# Altium PCB Q-Dice.PcbDoc
Units mm, origin at the board's own origin, x right, y up, seen from the top; angles counter-clockwise.
Board outline 75 x 107 mm, 2 copper layers (Top Layer, Bottom Layer); 64 components, 54 nets, 254 pads, 4 vias.
Unrouted connection lines stored in the file: 127.
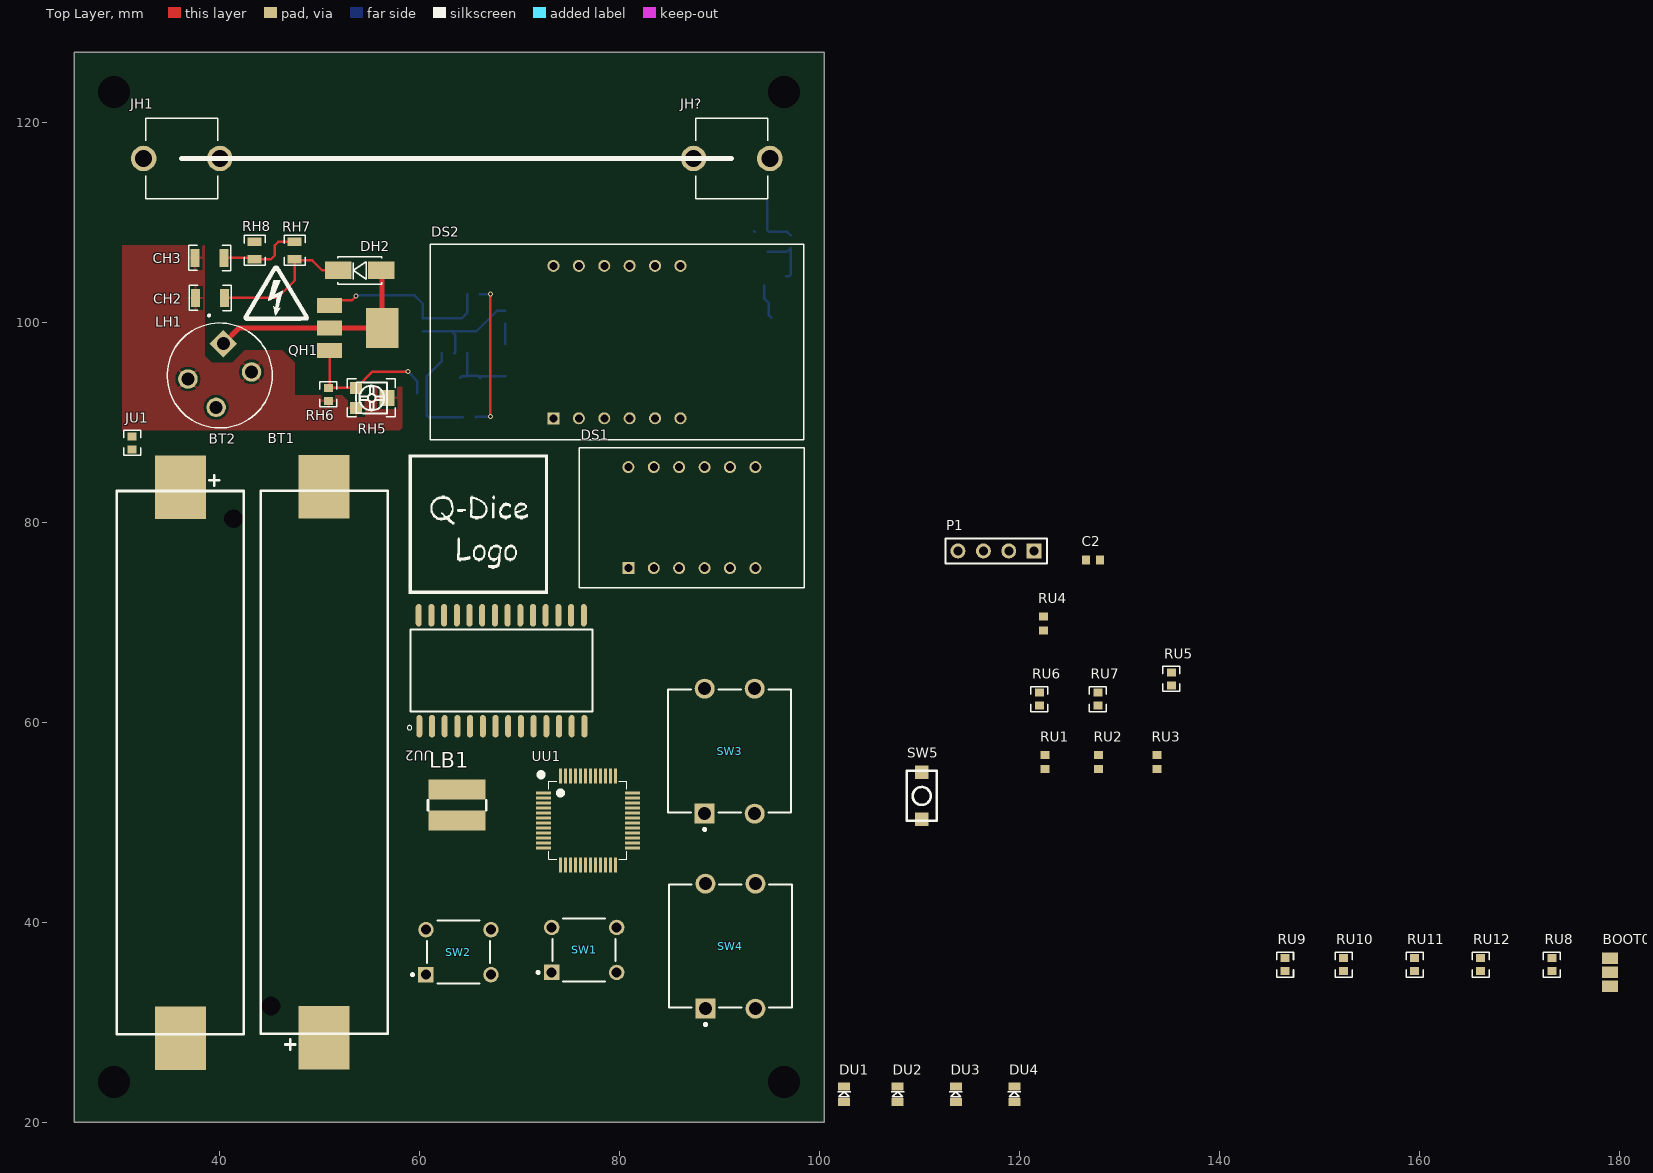
[diagram p0: Top Layer view]
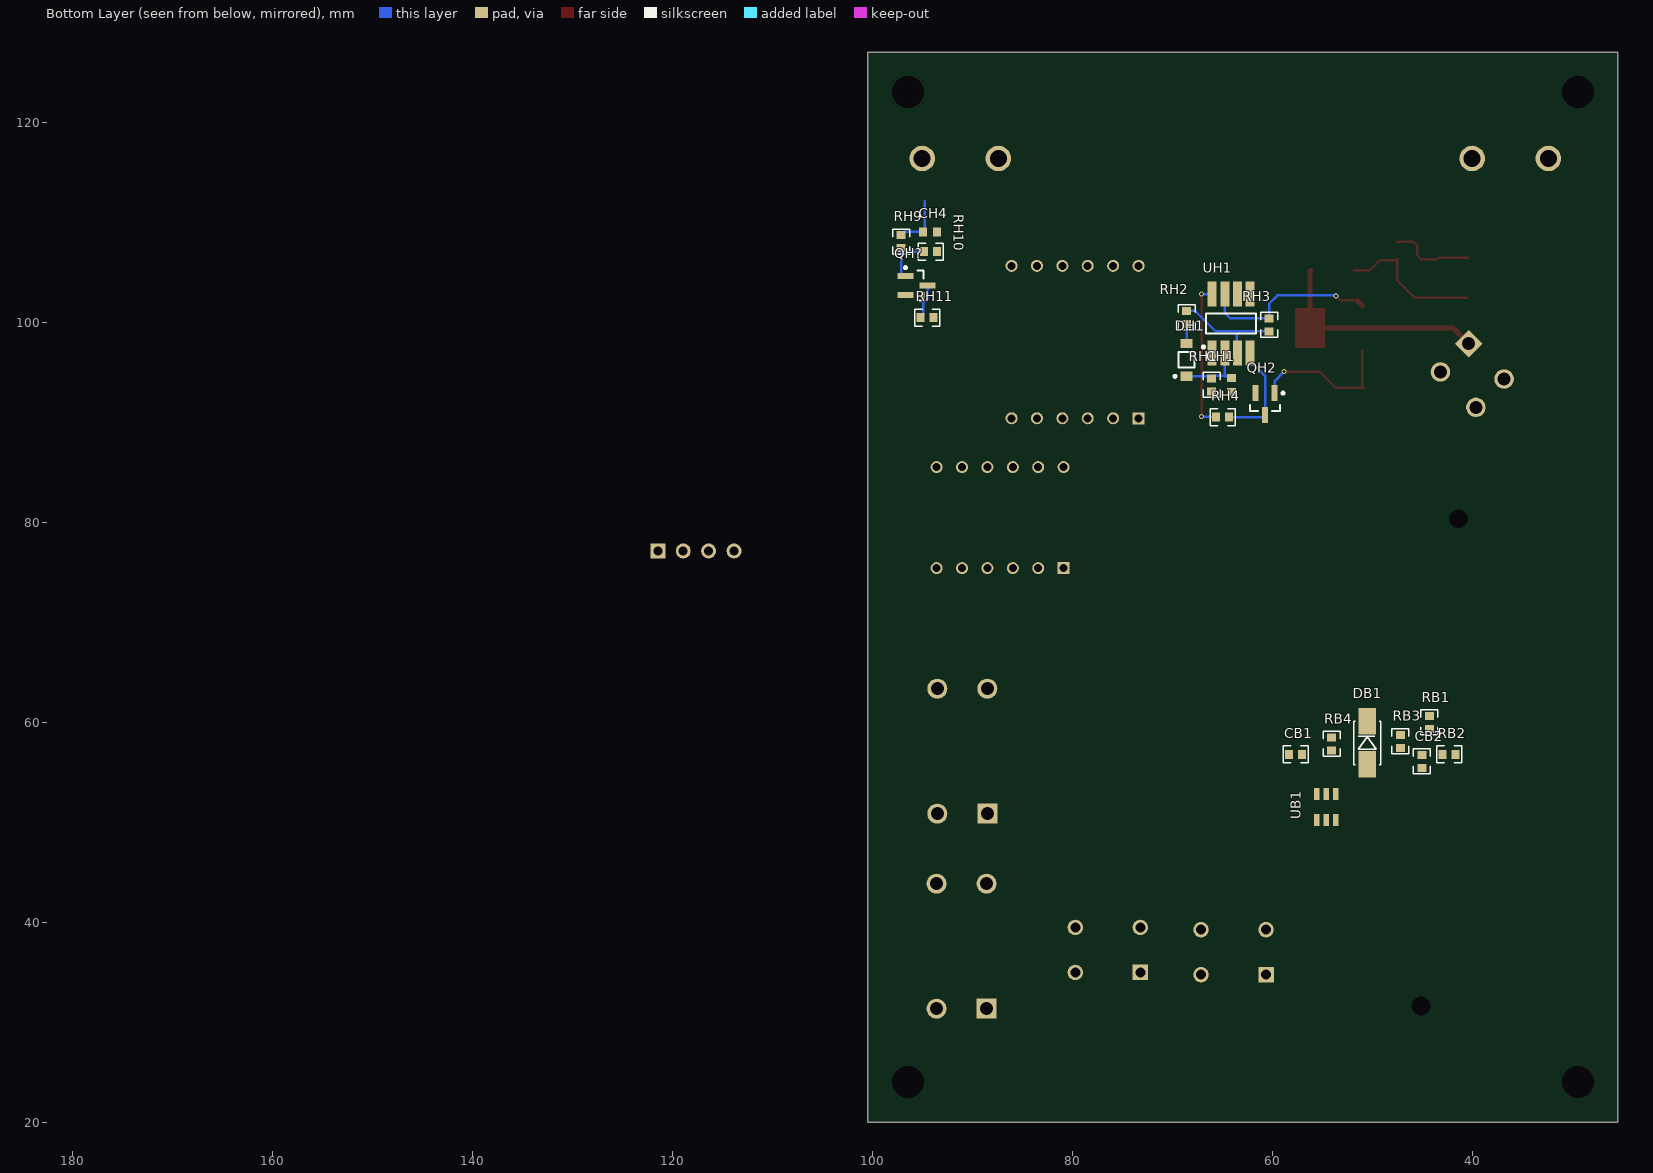
[diagram p1: Bottom Layer view, seen from below]

## Layer stack, top to bottom
Top Solder: solder mask 0.0102, Solder Resist, Dk 3.5
Top Layer: signal copper 0.0356
Dielectric 1: dielectric 0.32, FR-4, Dk 4.8
Bottom Layer: signal copper 0.0356
Bottom Solder: solder mask 0.0102, Solder Resist, Dk 3.5

## Board outline
25.45,20 25.45,127 100.45,127 100.45,20

## Design rules (kind name [scope] priority, off if disabled: settings)
Clearance [All] p1: gap=0.254 ignorepadtopadclearanceinfootprint=FALSE except(0: Arc-Hole Track-Hole SMDPad-Hole THPad-Hole Via-Hole Fill-Hole Poly-Hole Region-Hole Text-Hole)
PolygonConnect [All] p1: connectstyle=Relief reliefconductorwidth=0.254 reliefentries=4 polygonreliefangle="90 Angle" airgapwidth=0.254
RoutingVias [All] p1: holewidth=0.711 width=1.27 viastyle="Through Hole" minholewidth=0.3 minwidth=0.5 maxholewidth=0.711 maxwidth=1.27
SolderMaskExpansion [All] p1: expansion=0.102 istentingtop=FALSE
Width [All] p1: maxlimit=1 minlimit=0.152 preferedwidth=0.254
30 further rules are at their usual default settings.

## Classes and differential pairs
component class U_BoostConverter: CB1 CB2 DB1 LB1 RB1 RB2 RB3 RB4 UB1
component class U_GM-hv: CH1 CH2 CH3 CH4 DH1 DH2 JH1 JH? LH1 QH1 QH2 QH? RH1 RH2 RH3 RH4 RH5 RH6 RH7 RH8 RH9 RH10 RH11 UH1
component class Sheet1: BOOT0 BT1 BT2 C2 DS1 DS2 DU1 DU2 DU3 DU4 JU1 P1 RU1 RU2 RU3 RU4 RU5 RU6 RU7 RU8 RU9 RU10 RU11 RU12 SW1 SW2 SW3 SW4 SW5 UU1 UU2

## Components (designator, comment, footprint, x,y, rotation, side; value= is the part's Value field where it differs from the comment)
BOOT0 "2-Way Solder Jumper" SOLDERJUMPER_2WAY_OPEN_NOPASTE 179.009,35.002 r90 top
BT1 "Holder Cr2032 Gold Leads Smd" "AAA HOLDER SMD" 50.435,28.53 r90 top
BT2 "Holder Cr2032 Gold Leads Smd" "AAA HOLDER SMD" 36.065,83.42 r270 top
C2 "100nF" "C 0603 / 1608" 127.339,76.213 r0 top
CB1 "Cap" CAP0603R 57.675,56.775 r180 bottom value=28u
CB2 "Cap" CAP0603R 45.05,56.075 r90 bottom value=28u
CH1 "Cap" "C 0603 / 1608" 64.055,93.73 r90 bottom value=1nF
CH2 "Cap" CAP1206R 39.05,102.425 r0 top value=10nF/1kV
CH3 "Cap" CAP1206R 39,106.425 r0 top value=10nF/1kV
CH4 "Cap" "C 0603 / 1608" 94.225,109.025 r0 bottom value=220p
DB1 "SS34" DO-214AC 50.5,57.925 r90 bottom
DH1 "MMSD4148T1G" ONSC-SOD-123-2-425-04_V 68.57,96.23 r90 bottom
DH2 "BYG23M" DO-214AC 54,105.175 r180 top
DS1 "0.36''" "7-SEG 3BIT 0.36" 87.217,80.46 r0 top
DS2 "0.56''" BA56-12EWA 79.724,98.016 r0 top
DU1 "LED" "LED 0603" 102.43,22.801 r90 top
DU2 "LED" "LED 0603" 107.78,22.801 r90 top
DU3 "LED" "LED 0603" 113.606,22.801 r90 top
DU4 "LED" "LED 0603" 119.456,22.801 r90 top
JH1 "Fuse Clip" FUSE_BK-6003 36.2,116.375 r0 top
JH? "Fuse Clip" FUSE_BK-6003 91.2,116.375 r180 top
JU1 "JMP" RES0603R 31.25,87.925 r90 top value=0
LB1 "Inductor" "INDUCTOR CD54" 63.75,51.7 r0 top value=22uH
LH1 "12LRS156C" IND_12LRS156C 40,94.675 r315 top value=10mH
P1 "Header 4" HDR1X4 121.445,77.125 r180 top
QH1 "STN0214" "SOT-223-3 - NPN" 50.25,102.675 r270 top
QH2 "MMBT4401" ONSC-SOT-23-3-318-08_M 60.725,91.8 r270 bottom
QH? "MMBT4401" ONSC-SOT-23-3-318-08_M 95.575,103.65 r180 bottom
RB1 "Res1" RES0603R 44.3,59.975 r270 bottom value=JMP
RB2 "Res1" RES0603R 42.325,56.775 r0 bottom value=JMP
RB3 "Res1" RES0603R 47.2,58.075 r270 bottom value=11.5k
RB4 "Res1" RES0603R 54.075,57.825 r270 bottom value=2.55k
RH1 "Res1" RES0603R 66.055,93.73 r90 bottom value=220k
RH2 "Res1" RES0603R 68.555,100.48 r90 bottom value=1k
RH3 "Res1" RES0603R 60.305,99.73 r90 bottom value=330
RH4 "Res1" RES0603R 64.975,90.5 r0 bottom value=100k
RH5 "RPot" SMD_POT_3x3mm 52.95,94.025 r270 top value=200
RH6 "Res1" RES0603R 50.873,92.775 r90 top value=10k
RH7 "Res1" RES0805R 47.5,107.175 r90 top value=1M
RH8 "Res1" RES0805R 43.5,107.175 r90 top value=4.7M
RH9 "Res1" RES0603R 97.125,108.05 r90 bottom value=1.5k
RH10 "Res1" RES0603R 94.175,107.05 r0 bottom value=100k
RH11 "Res1" RES0603R 94.525,100.45 r180 bottom value=10k
RU1 "Res1" "C 0603 / 1608" 122.532,56.04 r90 top value=10k
RU2 "Res1" "C 0603 / 1608" 127.866,56.04 r90 top value=10k
RU3 "Res1" "C 0603 / 1608" 133.708,56.04 r90 top value=10k
RU4 "Res1" "C 0603 / 1608" 122.356,69.858 r90 top value=20k
RU5 "Res1" RES0603R 135.175,64.325 r90 top value=10k
RU6 "Res1" RES0603R 121.975,62.303 r90 top value=10k
RU7 "Res1" RES0603R 127.817,62.303 r90 top value=10k
RU8 "Res1" RES0603R 173.208,35.752 r90 top value=10k
RU9 "Res1" RES0603R 146.532,35.752 r90 top value=1k
RU10 "Res1" RES0603R 152.382,35.752 r90 top value=1k
RU11 "Res1" RES0603R 159.483,35.752 r90 top value=1k
RU12 "Res1" RES0603R 166.083,35.752 r90 top value=1k
SW1 "EVQ-PAE05R" FP-EVQ-PAE05R-MFG 76.45,37.225 r90 top
SW2 "EVQ-PAE05R" FP-EVQ-PAE05R-MFG 63.875,37 r90 top
SW3 "FSM100" FP-FSM100-MFG 91,57.1 r90 top
SW4 "FSM100" FP-FSM100-MFG 91.075,37.6 r90 top
SW5 "Switch" PUSH_SMD_3x4 111.7,50.125 r90 top
UB1 "MT3608" SOT23-6 54.6,51.5 r180 bottom
UH1 "NE555P" SOIC-8 64.115,99.868 r90 bottom
UU1 "STM32L053C8T6" LQFP48_7X7MM_0.5MMPP 76.825,50.175 r0 top
UU2 "TM1638" SOP-28 68.185,65.15 r90 top

## Footprints (in the part's own frame and the unit in brackets; to place one, negate y for a bottom-side part, rotate by r counter-clockwise, add the part's x,y. Pads: shape width x height; smd on the part's side, far side on the other; paste and mask are expansions set on the pad)
"7-SEG 3BIT 0.36" [mm]
  rect 1.2x1.2 hole 0.8: 1(-6.35,-5.05)
  round 1.2 hole 0.8: 2(-3.81,-5.05) 3(-1.27,-5.05) 4(1.27,-5.05) 5(3.81,-5.05) 6(6.35,-5.05) 7(6.35,5.05) 8(3.81,5.05) 9(1.27,5.05) 10(-1.27,5.05) 11(-3.81,5.05) 12(-6.35,5.05)
  silkscreen extent -11.25,-7 11.25,7, body extent -11.29,-6.95 11.21,7.05, height 7.3
"AAA HOLDER SMD" [mm]
  rect 6.35x5.08 smd: 1(-0.1,0) 2(55.03,0)
  rect 0x0 hole 1.89: ""(3.07,5.31)
  silkscreen extent -1.28,-6.35 54.63,6.35, body extent -3.9,-6.21 58.7,6.29, height 11.25
BA56-12EWA [mil]
  rect 47.25x47.25 hole 31.5: 1(-250,-300)
  round 47.25 hole 31.5: 2(-150,-300) 3(-50,-300) 4(50,-300) 5(150,-300) 6(250,-300) 7(250,300) 8(150,300) 9(50,300) 10(-50,300) 11(-150,300) 12(-250,300)
  silkscreen extent -735,-385 735,385, body extent -739,-373 742,375, height 317
"C 0603 / 1608" [mm] "Capacitor 0603 / 1608 (1.6 x 0.8 mm)"
  rect 0.8x0.9 smd: 1(-0.7,0) 2(0.7,0)
  body extent -0.8,-0.4 0.8,0.4, height 0.3
CAP0603R [mm] "capacitor 0603 reflow soldering"
  rect 0.8x0.9 smd: 1(-0.65,0) 2(0.65,0)
  silkscreen extent -1.25,-0.85 1.25,0.85, body extent -0.8,-0.4 0.8,0.4, height 0.3
CAP1206R [mm] "capacitor 1206 reflow soldering"
  rect 0.9x1.8 smd: 1(-1.45,0) 2(1.45,0)
  silkscreen extent -2.1,-1.27 2.1,1.27, body extent -1.6,-0.8 1.6,0.8, height 1
DO-214AC [mm]
  rect 2.65x1.75 smd: 1(-2.15,0) 2(2.15,0)
  silkscreen extent -2.19,-1.36 2.19,1.36, body extent -2.6,-1.3 2.6,1.3, height 2.4
FP-EVQ-PAE05R-MFG [mm]
  rect 1.55x1.55 hole 1 paste-1000 mask+0: A(-2.25,3.25)
  round 1.55 hole 1 paste-1000 mask+0: A'(-2.25,-3.25) B(2.25,3.25) B'(2.25,-3.25)
  silkscreen extent -3.15,-3.15 3.15,4.72, body extent -3.25,-4.13 3.25,4.13, height 0.25
FP-FSM100-MFG [mm]
  rect 2x2 hole 1.3 paste-1000 mask+0: 1(-6.25,2.5)
  round 2 hole 1.3 paste-1000 mask+0: 2(6.25,2.5) 3(-6.25,-2.5) 4(6.25,-2.5)
  silkscreen extent -7.95,-6.15 6.15,6.15, body extent -7.35,-6.25 7.35,6.25, height 0.25
FUSE_BK-6003 [mm]
  round 2.55 hole 1.7: 1(-3.81,0) 1(3.81,0)
  silkscreen extent -3.58,-4.01 3.58,4.01, body extent -3.56,-3.39 3.55,3.5, height 10.67
HDR1X4 [mm] "Connector; Header; 4 Position"
  rect 1.5x1.5 hole 0.9: 1(0,0)
  round 1.5 hole 0.9: 2(2.54,0) 3(5.08,0) 4(7.62,0)
  silkscreen extent -1.27,-1.27 8.89,1.27
IND_12LRS156C [mm]
  rect 1.95x1.95 hole 1.3: 1(-2,2.5)
  round 1.95 hole 1.3: 2(-2,-2.5) 3(2,-2.5) 4(2,2.5)
  silkscreen extent -5.25,-5.25 5.25,5.25, body extent -5.25,-5.25 5.25,5.25, height 10.5
"INDUCTOR CD54" [mm]
  rect 5.7x2 smd: 1(0,1.55) 2(0,-1.55)
  silkscreen extent -2.92,-0.51 2.92,0.48, body extent -2.6,-2.96 2.6,2.96, height 4.5
"LED 0603" [mm]
  rect 0.8x1.2 smd: 1(-0.762,0) 2(0.762,0)
  silkscreen extent -0.25,-0.65 0.25,0.64, body extent -0.81,-0.45 0.89,0.45, height 0.75
LQFP48_7X7MM_0.5MMPP [mm]
  rect 1.5x0.3 smd: 1(-4.45,2.75) 2(-4.45,2.25) 3(-4.45,1.75) 4(-4.45,1.25) 5(-4.45,0.75) 6(-4.45,0.25) 7(-4.45,-0.25) 8(-4.45,-0.75) 9(-4.45,-1.25) 10(-4.45,-1.75) 11(-4.45,-2.25) 12(-4.45,-2.75) 25(4.45,-2.75) 26(4.45,-2.25) 27(4.45,-1.75) 28(4.45,-1.25) 29(4.45,-0.75) 30(4.45,-0.25) 31(4.45,0.25) 32(4.45,0.75) 33(4.45,1.25) 34(4.45,1.75) 35(4.45,2.25) 36(4.45,2.75)
  rect 0.3x1.5 smd: 13(-2.75,-4.45) 14(-2.25,-4.45) 15(-1.75,-4.45) 16(-1.25,-4.45) 17(-0.75,-4.45) 18(-0.25,-4.45) 19(0.25,-4.45) 20(0.75,-4.45) 21(1.25,-4.45) 22(1.75,-4.45) 23(2.25,-4.45) 24(2.75,-4.45) 37(2.75,4.45) 38(2.25,4.45) 39(1.75,4.45) 40(1.25,4.45) 41(0.75,4.45) 42(0.25,4.45) 43(-0.25,4.45) 44(-0.75,4.45) 45(-1.25,4.45) 46(-1.75,4.45) 47(-2.25,4.45) 48(-2.75,4.45)
  silkscreen extent -4.9,-3.9 3.9,4.78, body extent -4.5,-4.5 4.5,4.5, height 1.6
ONSC-SOD-123-2-425-04_V [mm] "SOD, 2-Leads, Body 2.69x1.6mm"
  rect 0.91x1.22 smd: 1(-1.635,0) 2(1.635,0)
  silkscreen extent -1.76,-0.8 0.78,1.29, body extent -1.35,-0.8 1.35,0.8, height 1.35
ONSC-SOT-23-3-318-08_M [mm] "SOT23, 3-Leads, Body 3.04x1.4mm, Pitch 0.95mm, IPC Low Density"
  rect 1.6x0.6 smd: 1(-1.1,0.95) 2(-1.1,-0.95) 3(1.1,0)
  silkscreen extent -1.22,-1.5 0.7,1.92, body extent -0.7,-1.52 0.7,1.52, height 1.11
PUSH_SMD_3x4 [mm]
  rect 1.35x1.35 smd: 1(0.15,1.5) 2(4.85,1.5)
  silkscreen extent 0,0 5,3, body extent 0.05,0.05 4.95,2.95, height 2
RES0603R [mm] "resistor 0603 reflow soldering"
  rect 0.8x0.9 smd: 1(-0.65,0) 2(0.65,0)
  silkscreen extent -1.25,-0.85 1.25,0.85, body extent -0.8,-0.4 0.8,0.4, height 0.45
RES0805R [mm] "resistor 0805 reflow soldering"
  rect 0.85x1.4 smd: 1(-0.875,0) 2(0.875,0)
  silkscreen extent -1.5,-1.05 1.5,1.05, body extent -1,-0.62 1,0.63, height 0.5
SMD_POT_3x3mm [mm] "https://ae01.alicdn.com/kf/HTB1u8VOIVXXXXaMXFXXq6xXFXXXn/202183707/HTB1u8VOIVXXXXaMXFXXq6xXFXXXn.jpg?size=54797&height=535&width=908&hash=f9182dae1c0bb9b5ef09d7fbeb165d97"
  rect 1.2x1.2 smd: 1(0.6,0.7) 3(2.6,0.7)
  rect 1.6x1.5 smd: 2(1.6,3.8)
  silkscreen extent -0.3,-0.2 3.5,4.6, body extent 0.05,0.3 3.15,4.1, height 1.62
SOIC-8 [mm]
  rect 2.5x0.9 smd: 1(-2.95,1.905) 2(-2.95,0.635) 3(-2.95,-0.635) 4(-2.95,-1.905) 5(2.95,-1.905) 6(2.95,-0.635) 7(2.95,0.635) 8(2.95,1.905)
  silkscreen extent -2.47,-2.5 1,2.88, body extent -3,-2.45 3,2.45, height 1.75
SOLDERJUMPER_2WAY_OPEN_NOPASTE [mil]
  rect 46x63 smd paste-31.5: 1(-55,0) 3(55,0)
  rect 46x63 smd: 2(0,0)
SOP-28 [mm]
  oval 2.25x0.6 smd: 1(-5.55,8.225) 2(-5.55,6.955) 3(-5.55,5.685) 4(-5.55,4.415) 5(-5.55,3.145) 6(-5.55,1.875) 7(-5.55,0.605) 8(-5.55,-0.665) 9(-5.55,-1.935) 10(-5.55,-3.205) 11(-5.55,-4.475) 12(-5.55,-5.745) 13(-5.55,-7.015) 14(-5.55,-8.285) 15(5.55,-8.225) 16(5.55,-6.955) 17(5.55,-5.685) 18(5.55,-4.415) 19(5.55,-3.145) 20(5.55,-1.875) 21(5.55,-0.605) 22(5.55,0.665) 23(5.55,1.935) 24(5.55,3.205) 25(5.55,4.475) 26(5.55,5.745) 27(5.55,7.015) 28(5.55,8.285)
  silkscreen extent -5.92,-9.1 4.1,9.42, body extent -5.1,-8.87 5.1,8.87, height 2.8
SOT23-6 [mm]
  rect 0.55x1.2 smd: 1(-0.95,-1.3) 2(0,-1.3) 3(0.95,-1.3) 4(0.95,1.3) 5(0,1.3) 6(-0.95,1.3)
"SOT-223-3 - NPN" [mm]
  rect 4x3.25 smd: 1(3.25,6)
  rect 1.5x2.5 smd: 1(3.25,0.75) 2(1,0.75) 3(5.5,0.75)
  Top Layer region: 1.25,4.5 5.25,4.5 5.25,7.5 1.25,7.5
  body extent -0.1,-0.22 6.6,7.08, height 1.8

## Part data
BOOT0: library part SOLDERJUMPER_2WAY0603
BT1 BT2: library part BU2032SM-BT-GTR, Package=None, Availability=Good, MF=MPD, MP=BU2032SM-BT-GTR, Price="0.64 USD"
C2: library part Capacitor
CB1 CB2 CH1 CH2 CH3 CH4: "Capacitor", LatestRevisionDate=17-Jul-2002, LatestRevisionNote="Re-released for DXP Platform.", PackageDescription="Radial Cap, Thru-Hole; 2 Leads; 0.3 in Pin Spacing", PackageReference=RAD-0.3, Published=8-Jun-2000, Publisher="Altium Limited"
DB1 DH2: library part Diode, "Default Diode", Code_JEDEC=DO-214-AB, LatestRevisionDate=17-Jul-2002, LatestRevisionNote="Re-released for DXP Platform.", PackageDescription="DO-214-AB/SMC; 2 C-Bend Leads; Body 7.9 x 5.9 mm, inc. leads (LxW)", PackageReference=SMC, PackageVersion=Sep-1996, Published=8-Jun-2000, Publisher="Altium Limited"
DH1: library part CMP-0895-00001-2, "Switching Diode, 2-Pin SOD-123, Pb-Free, Tape and Reel", Manufacturer="On Semiconductor", ComponentLink1Description="Manufacturer URL", ComponentLink1URL=http://www.onsemi.com/, ComponentLink2Description=Datasheet, ComponentLink2URL=http://www.onsemi.com/pub_link/Collateral/MMSD4148T1-D.PDF, ComponentLink3Description="Package Specification", ComponentLink3URL=http://www.onsemi.com/pub_link/Collateral/425-04.PDF, Configuration=Single, DatasheetVersion="Rev. 11", IF Max (A)=0.2, Mounting Technology="Surface Mount", PackageDescription="2-Pin SOD, Body 1.6 x 2.69 mm", PackageReference=SOD-123-2-425-04, PackageVersion="Rev. G, 10/2009", Packing="Tape and Reel", PartNumber=MMSD4148T1G, RoHS=TRUE, trr Max (ns)=4
DS1 DS2: library part BA56-12EWA, Package="DIP-12 Kingbright", Availability=Good, MF=Kingbright, MP=BA56-12EWA, Price="2.42 USD"
JU1: library part Res1, "Resistor", LatestRevisionDate=17-Jul-2002, LatestRevisionNote="Re-released for DXP Platform.", PackageDescription="Axial Device, Thru-Hole; 2 Leads; 0.3 in Pin Spacing", PackageReference=AXIAL-0.3, Published=8-Jun-2000, Publisher="Altium Limited"
LH1: library part Inductor_Shielded, "Inductor", Code_IEC=1005, Code_JEITA=0402, LatestRevisionDate=29-May-2009, LatestRevisionNote="IPC-7351 Footprint Added.", PackageDescription="Chip Inductor", PackageReference=0402-A, Published=8-Jun-2000, Publisher="Altium Limited"
P1: "Header, 4-Pin", LatestRevisionDate=17-Jul-2002, LatestRevisionNote="Re-released for DXP Platform.", Publisher="Altium Limited"
QH1: library part NPN, "NPN Bipolar Transistor", Code_JEDEC=TO-226-AA, LatestRevisionDate=17-Jul-2002, LatestRevisionNote="Re-released for DXP Platform.", PackageDescription="TO, Flat Index; 3 In-Line, Axial Leads; Body Dia. 4.8mm; Leads 0.55 x 0.51 mm (max)", PackageReference=TO-226-AA, Published=8-Jun-2000, Publisher="Altium Limited"
QH2 QH?: library part CMP-0722-00001-1, "General Purpose Transistor, NPN, 0.6 A IC Continuous, 3-Pin SOT23, RoHS, Tape and Reel", Manufacturer="ON Semiconductor", PartNumber=MMBT2222LT1G, ComponentLink1Description="Manufacturer URL", ComponentLink1URL=http://www.onsemi.com/, ComponentLink2Description=Datasheet, ComponentLink2URL=http://www.onsemi.com/pub_link/Collateral/MMBT2222LT1-D.PDF, ComponentLink3Description="Package Specification", ComponentLink3URL=http://www.onsemi.com/pub_link/Collateral/MMBT2222LT1-D.PDF, DatasheetVersion="Rev. 10", FT="250 MHz", HFE Max.=300, HFE Min.=100, IC Continuous="0.6 A", Mounting Technology="Surface Mount", PackageDescription="3-Pin SOT23, Body 2.9 x 1.3 mm, Pitch 0.95 mm", PackageReference=SOT-23-3, PackageVersion="Rev. AP", Packing="Tape and Reel", Polarity=NPN, PTM Max.="0.225 W", RoHS=TRUE, V(BR) CEO="30 V Min."
RB1 RB2 RB3 RB4 RH1 RH2 RH3 RH4 RH6 RH7 RH8 RH9 RH10 RH11 RU1 RU2 RU3 RU4 RU5 RU6 RU7 RU8 RU9 RU10 RU11 RU12: "Resistor", LatestRevisionDate=17-Jul-2002, LatestRevisionNote="Re-released for DXP Platform.", PackageDescription="Axial Device, Thru-Hole; 2 Leads; 0.3 in Pin Spacing", PackageReference=AXIAL-0.3, Published=8-Jun-2000, Publisher="Altium Limited"
RH5: "Potentiometer", LatestRevisionDate=17-Jul-2002, LatestRevisionNote="Re-released for DXP Platform.", PackageDescription="Variable Resistor, Thru-Hole; 3 Leads", PackageReference=VR5, Published=8-Jun-2000, Publisher="Altium Limited", Set Position=0.5, Sim Note="Enter the Resistance value and the set point into parameter fields."
SW1 SW2: library part CMP-05618-000051-1, "SWITCH TACTILE SPST-NO 0.02A 15V", Actuator Color=Red, Contact Current Rating=20mA, Contact Resistance=50mR, Max Operating Temperature=70°C, Max Voltage Rating (DC)=15V, Min Operating Temperature=-20°C, Operating Force=1.6N, Package Quantity=500, Actuator Length=1.1mm, Actuator Type=Standard, Color=Red, Contact Plating=Gold, Current Rating=20mA, Depth=7.8mm, Electrical Life=100000Cycles, Height=5mm, Illumination Type=Non-Illuminated, Lead Free="Lead Free", Length=6mm, Max Current Rating=20mA, Mechanical Life=100000Cycles, Mount="Through Hole", Orientation=Straight, Packaging=Bulk, Radiation Hardening=No, Series=EVQPA, Size=6mm, Switch Function=Off-Mom, Switch Travel=0.25mm, Termination="PC Pin", Throw Configuration=SPST, Voltage Rating (DC)=15V, Width=6mm
SW3 SW4: library part CMP-03402-000014-1, "SWITCH TACTILE SPST-NO 0.05A 24V", Actuator Color=Black, Contact Current Rating=50mA, Contact Resistance=100mR, Max Operating Temperature=85°C, Max Voltage Rating (DC)=12V, Min Operating Temperature=-35°C, Operating Force=1.57N, Package Quantity=400, Voltage Rating (DC)=24V, Actuator Length=6.35mm, Actuator Material=Polyester, Actuator Type=Standard, Contact Material="Copper Alloy", Contact Plating=Silver, Contact Type="1 maker", Current Rating=50mA, Depth=12.5mm, Electrical Life=100000Cycles, ELV=Compliant, Illumination Type=Non-Illuminated, Lead Free="Lead Free", Length=12mm, Max Current Rating=50mA, Mechanical Life=100000Cycles, Mount="Through Hole", Orientation=Straight, Packaging="Loose Piece", RoHS Compliant=Yes, Series="FSM100 ~ 104", Switch Function=Off-Mom, Switch Travel=0.3mm, Termination="PC Pins", Throw Configuration=SPST, Type=Switch
SW5: library part B3U-1000P, Manufacturer=Omron, DIGIKEY=SW1020CT-ND, MPN=B3U-1000P
UB1: "Boost converter"
UH1: Package="PDIP-8 STMicroelectronics", Availability=Unavailable, MF="Texas Instruments", MP=NE555P, Price=None, SnapEDA_Link=https://www.snapeda.com/parts/NE555P/Texas%20Instruments/view-part/?ref=snap
UU1: "ARMÂ® CortexÂ®-M0+ STM32L0 Microcontroller IC 32-Bit 32MHz 64KB _64K x 8_ FLASH 48-LQFP _7x7_", Package="LQFP-48 STMicroelectronics", Digi-Key_Part_Number=497-14906-ND, Digi-Key_Purchase_URL=https://www.digikey.nl/product-detail/en/stmicroelectronics/STM32L053C8T6/497-14906-ND/4935255?utm_source=snapeda&utm_medium=aggregator&utm_campaign=symbol, MF=STMicroelectronics, MP=STM32L053C8T6, SnapEDA_Link=https://www.snapeda.com/parts/STM32L053C8T6/STMicroelectronics/view-part/552329/?ref=snap
UU2: "7Seg and keyboard driver"
LB1: Code_IEC=1005, Code_JEITA=0402, LatestRevisionDate=29-May-2009, LatestRevisionNote="IPC-7351 Footprint Added.", PackageDescription="Chip Inductor", PackageReference=0402-A, Published=8-Jun-2000, Publisher="Altium Limited"

## Free pads (board coordinates)
  rect 0x0 hole 3.2: ""(29.45,24) ""(29.45,123) ""(96.45,24) ""(96.45,123)

## Via types
v1: diameter 0.5, hole 0.3, Top Layer to Bottom Layer, 4 vias

## Nets (pads, with @x,y where several pads share a name; then routed paths per layer and width w, separated by ;. In a path a pad name is that pad's centre, name@x,y a point inside that pad or via, vN(x,y) a via of type N, cw(c..) or ccw(c..) an arc to the next point about the centre after c; other vN are vias at no path point)
CS: RU3.2 UU1.45 UU2.28
DATA: RU1.2 UU1.46 UU2.26
DGND: BOOT0.3 BT2.2 C2.2 CB1.1 CB2.1 DU1.2 DU2.2 DU3.2 DU4.2 JU1.1 P1.4 RB2.2 RB4.2 SW1.A SW1.A' SW2.A SW2.A' SW3.3 SW3.4 SW4.3 SW4.4 SW5.1 UB1.2 UU1.8 UU1.23 UU1.35 UU1.47 UU2.18 UU2.25
GND: CH1.1 CH2.1 CH3.1 CH4.1 JU1.2 LH1.2 LH1.4 QH2.2 QH?.2 RH1.1 RH5.2 RH5.3 RH6.1 RH10.1 UH1.1 UH1.6 | length 0.1
  Bottom Layer w0.254: CH4.1@93.45,109.1 CH4.1
GR1: DS1.12 UU2.24
GR2: DS1.9 UU2.23
GR3: DS1.8 UU2.22
GR4: DS2.12 UU2.21
GR5: DS2.9 UU2.20
GR6: DS2.8 UU2.19
LED1: RU9.2 UU1.43
LED2: RU10.2 UU1.42
LED3: RU11.2 UU1.41
LED4: RU12.2 UU1.40
NetBOOT0_2: BOOT0.2 UU1.44
NetBT1_2: BT1.2 BT2.1
NetCB1_2: CB1.2 RB1.2 RB2.1 UB1.4
NetCH1_2: CH1.2 DH1.1 RH1.2 UH1.2 | length 7.1
  Bottom Layer w0.254: CH1.2 64.22,94.595 64.75,94.595 ; UH1.2 64.75,94.785 64.882,94.653 65.782,94.653 RH1.2@65.84,94.595 ; RH1.2 RH1.2@65.84,94.595 ; DH1.1 RH1.2@65.84,94.595
NetCH2_2: CH2.2 DH2.2 RH7.1 | length 14.7
  Top Layer w0.254: CH2.2 45.75,102.425 47.5,104.175 RH7.1 47.625,106.175 49.25,106.175 50.25,105.175 DH2.2
NetCH3_2: CH3.2 RH7.2 RH8.1 | length 8.4
  Top Layer w0.254: CH3.2 43.375,106.425 RH8.1 45.125,106.3 45.5,106.675 45.5,107.675 45.875,108.05 RH7.2
NetCH4_2: CH4.2 JH?.1 RH9.2 | length 5.5
  Bottom Layer w0.254: 94.75,112.115 94.75,109.2 CH4.2 96.75,109.025 97.075,108.7 RH9.2
NetDB1_1: DB1.1 LB1.2 UB1.1
NetDH1_2: DH1.2 RH2.1 | length 2
  Bottom Layer w0.254: RH2.1 68.555,97.88 DH1.2
NetDH2_1: DH2.1 LH1.1 QH1.1 | length 22.3
  Top Layer w0.5: LH1.1 41.922,99.425 51,99.425 56.25,99.425 56.25,105.075 DH2.1
NetDU1_1: DU1.1 RU9.1
NetDU2_1: DU2.1 RU10.1
NetDU3_1: DU3.1 RU11.1
NetDU4_1: DU4.1 RU12.1
NetJH1_1: JH1.1 RH8.2
NetQH1_2: QH1.2 RH3.2 UH1.7 | length 18.1
  Top Layer w0.25: QH1.2@51.5,102.175 53.2,102.175 v1(53.65,102.625)
  Top Layer w0.5: QH1.2 QH1.2@51.5,102.175
  Bottom Layer w0.25: v1@53.7,102.675 58.25,102.675
  Bottom Layer w0.254: 58.25,102.675 59.5,102.675 60.305,101.87 RH3.2 64.205,100.38 64.75,100.925 UH1.7
  Bottom Layer w0.5: v1(53.65,102.625) v1@53.7,102.675
NetQH1_3: QH1.3 QH2.1 RH5.1 RH6.2 | length 15
  Top Layer w0.254: QH1.3 51,93.552 RH6.2 RH5.1 55.28,95.055 v1(58.807,95.055)
  Bottom Layer w0.254: v1(58.807,95.055) 59.775,94.087 QH2.1
NetQH?_1: QH?.1 RH9.1 RH10.2 | length 5.6
  Bottom Layer w0.254: RH10.2 96.725,107.05 97.075,107.4 RH9.1 97.125,104.773 96.952,104.6 QH?.1
NetRB3_2: RB3.2 RB4.1 UB1.3
NetRH2_2: RH2.2 RH3.1 UH1.3 | length 11.4
  Bottom Layer w0.254: RH3.1 63.205,99.08 ; UH1.3 63.555,96.993 63.555,98.73 63.205,99.08 ; RH2.2 67.705,101.13 65.655,99.08 63.205,99.08
PULSE: QH?.3 RH11.1 UU1.22 | length 3.5
  Bottom Layer w0.254: QH?.3 94.475,102.338 94.902,101.912 94.902,100.723 RH11.1
RESET: QH2.3 RH4.1 UH1.4 | length 10.5
  Bottom Layer w0.254: UH1.4 62.21,96.118 60.725,94.633 QH2.3 60.725,90.673 60.898,90.5 RH4.1
RST: C2.1 RU4.2 SW5.2 UU1.7
RX: P1.3 UU1.31
SCK: RU2.2 UU1.21 UU2.27
SEG1: DS1.11 DS2.11 UU2.5
SEG2: DS1.7 DS2.7 UU2.6
SEG3: DS1.4 DS2.4 UU2.7
SEG4: DS1.2 DS2.2 UU2.8
SEG5: DS1.1 DS2.1 UU2.9
SEG6: DS1.10 DS2.10 UU2.10
SEG7: DS1.5 DS2.5 UU2.11
SEG8: DS1.3 DS2.3 UU2.12
SW1: RU5.1 SW1.B SW1.B' UU1.28
SW2: RU6.1 SW2.B SW2.B' UU1.27
SW3: RU7.1 SW3.1 SW3.2 UU1.26
SW4: RU8.1 SW4.1 SW4.2 UU1.25
TX: P1.2 UU1.30
VBAT: BT1.1 LB1.1 RB1.1 UB1.5
VCC: BOOT0.1 CB2.2 DB1.2 LH1.3 P1.1 RB3.1 RH4.2 RH11.2 RU1.1 RU2.1 RU3.1 RU4.1 RU5.2 RU6.2 RU7.2 RU8.2 UH1.8 UU1.9 UU1.24 UU1.48 UU2.4 UU2.15 | length 14.8
  Top Layer w0.254: v1(67.075,90.55) v1(67.075,102.8)
  Bottom Layer w0.254: RH4.2 65.675,90.55 v1(67.075,90.55) ; UH1.8 66.038,102.8 v1(67.075,102.8)
pads on no net: BT1. BT2. DS1.6 DS2.6 UB1.6 UH1.5 UU1.1 UU1.2 UU1.3 UU1.4 UU1.5 UU1.6 UU1.10 UU1.11 UU1.12 UU1.13 UU1.14 UU1.15 UU1.16 UU1.17 UU1.18 UU1.19 UU1.20 UU1.29 UU1.32 UU1.33 UU1.34 UU1.36 UU1.37 UU1.38 UU1.39 UU2.1 UU2.2 UU2.3 UU2.13 UU2.14 UU2.16 UU2.17

## Polygon pours and split planes (outlines as drawn)
GND on Top Layer "VCC_3V3" (solid, pour order 1): 41.25,95.925 42.5,97.175 46.25,97.175 47.5,95.925 47.5,92.675 52.25,92.675 52.75,92.175 55.5,92.175 55.504,93.535 58.25,93.535 58.25,89.425 58,89.175 30.25,89.175 30.25,95.925
GND on Top Layer "VCC_3V3" (solid, pour order 0): 38.5,107.675 38.511,96.664 40.125,95.05 38.5,93.425 36.25,91.175 30.25,91.175 30.25,107.675

## Silkscreen, mask and mechanical layers (free items; w line width, h text height)
Top Overlay:
  drawing of 15 lines, arcs and shapes, not listed
Mechanical 1:
  the board outline again, w0.5
Mechanical 2:
  lines w0.5: 25.45,20 29.45,20 29.45,24